# EAGLE board photon_rj45 (EAGLE 8.5.0)
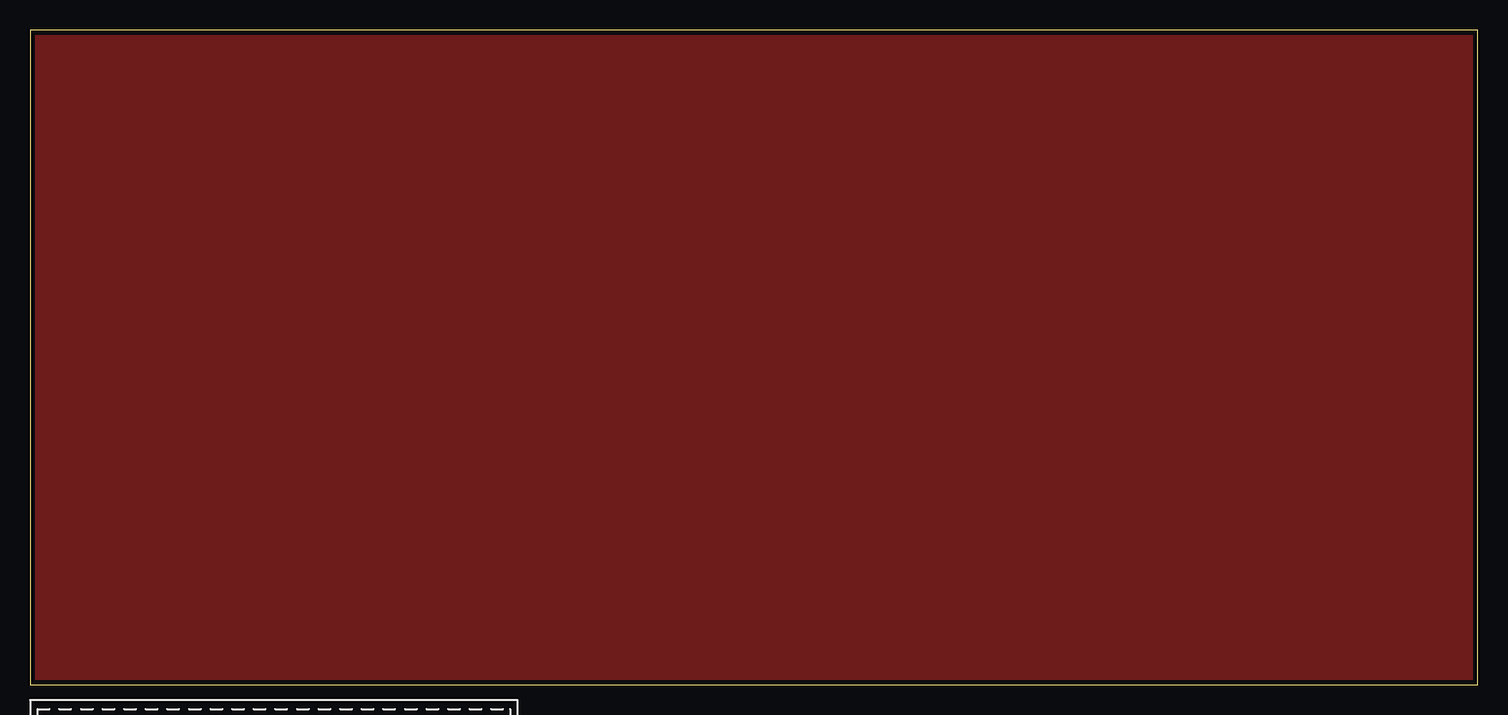
[diagram p0: board, top side]
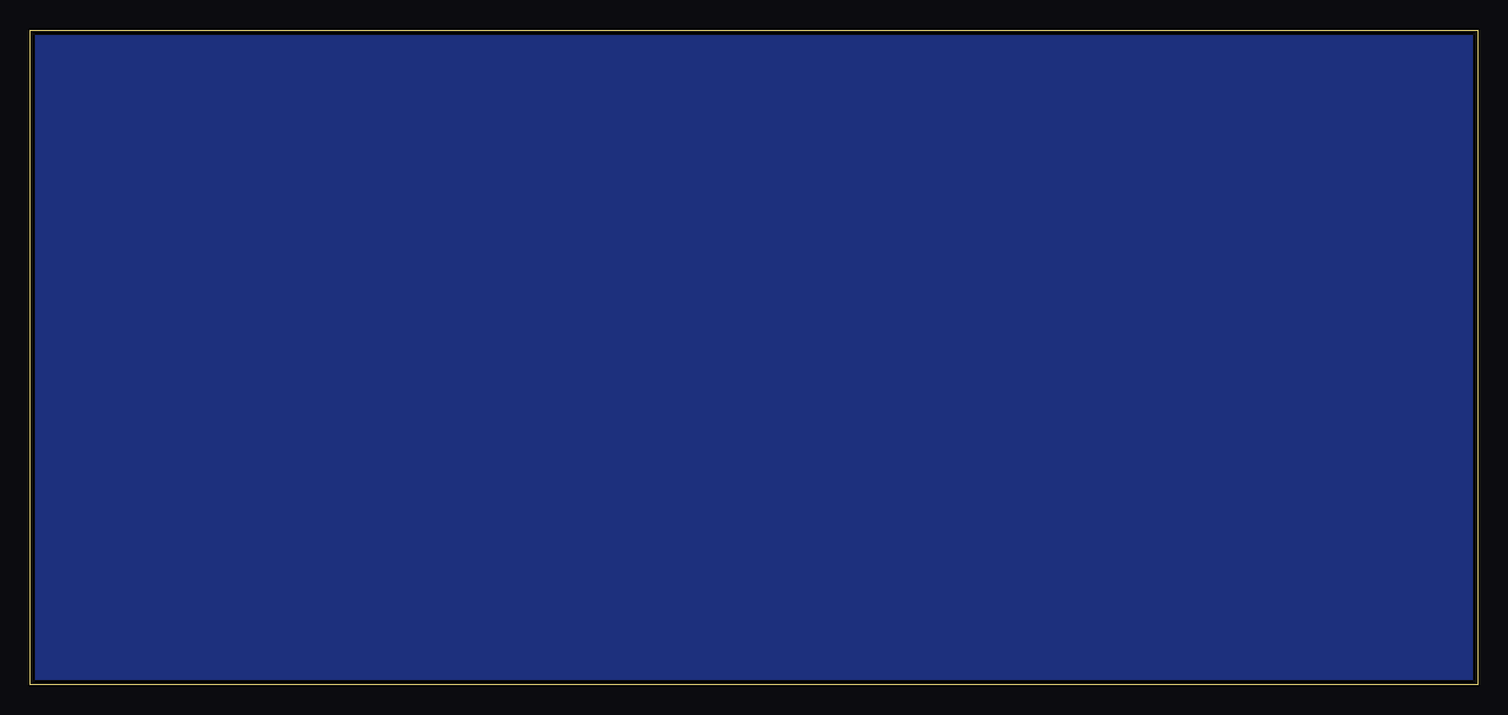
[diagram p1: board, bottom side, seen from below]

Size 120.65 x 54.61 mm. Coordinates in mm from the lower left corner, seen from the top.
Outline: 0,0 120.65,0 120.65,54.61 0,54.61 0,0
Copper layers (1*16): Top 0.035559375mm / dielectric 1.6mm / Bottom 0.035559375mm
Design rules "oshpark-2layer-mask": minimum track width 6mil, minimum drill 10mil, track to track 6mil, track to pad 6mil, pad to pad 6mil, via to via 6mil, smd to smd 6mil, copper to edge 15mil, drill to drill 6mil, minimum pad ring 5mil, minimum via ring 5mil, stop-mask expansion 2.5mil, vias tented up to drill 20mil, thermal gap 10mil

## Placement (x,y rotation side)
U$1  AUTHOR  [AUTHOR]  0,-8.89 0 top  (outside the outline)
U$2  TITLE  [TITLE]  0,-17.78 0 top  (outside the outline)

## Library data of the parts
U$1 = openag-frames; AUTHOR: XX; MPN: N/A
U$2 = openag-frames; MPN: N/A; TITLE: Example Title; URL: https://github.com/openaginitiative/openag_eagle/proj/; VER: 1.0

## Tracks (layer width: path | path; a pad name or v marks a point on that pad's centre or on a via)
GND
  pour Top (isolate 0.305, rank 3): 0,0 120.65,0 120.65,54.61 0,54.61
  pour Bottom (isolate 0.305, rank 3): 0,0 120.65,0 120.65,54.61 0,54.61